# Allegro board testBoard_v8_7x2.brd
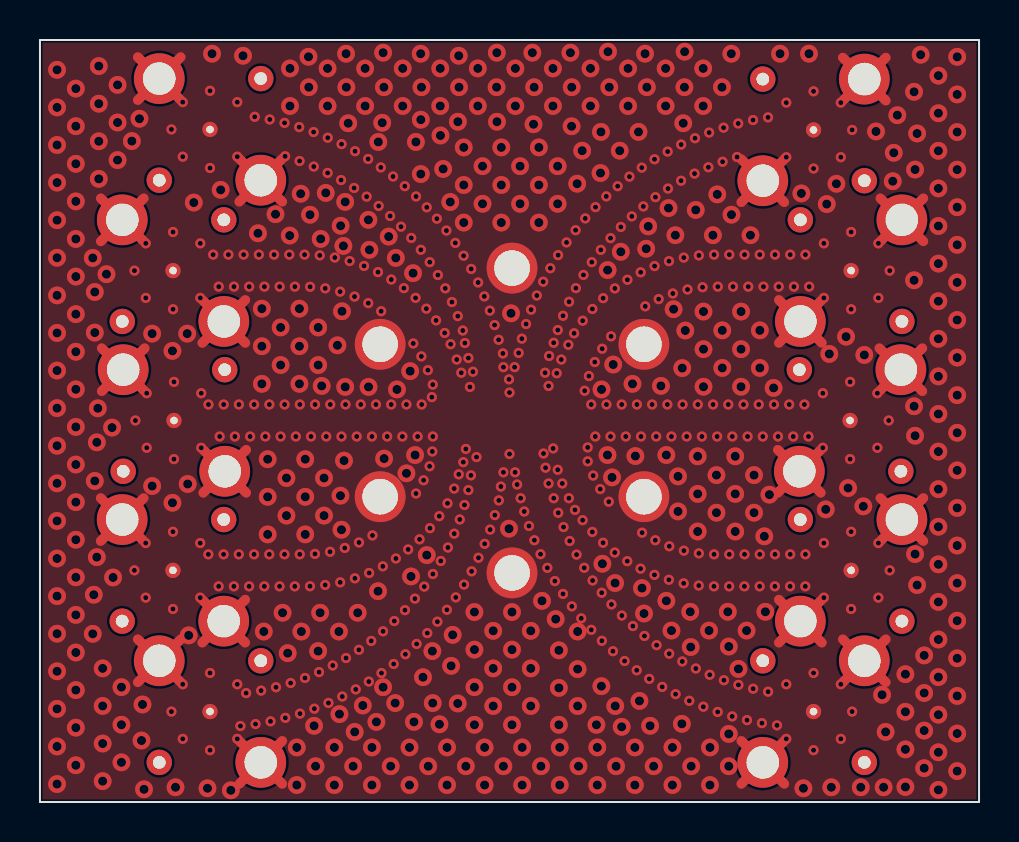
[diagram p0: board, top side]
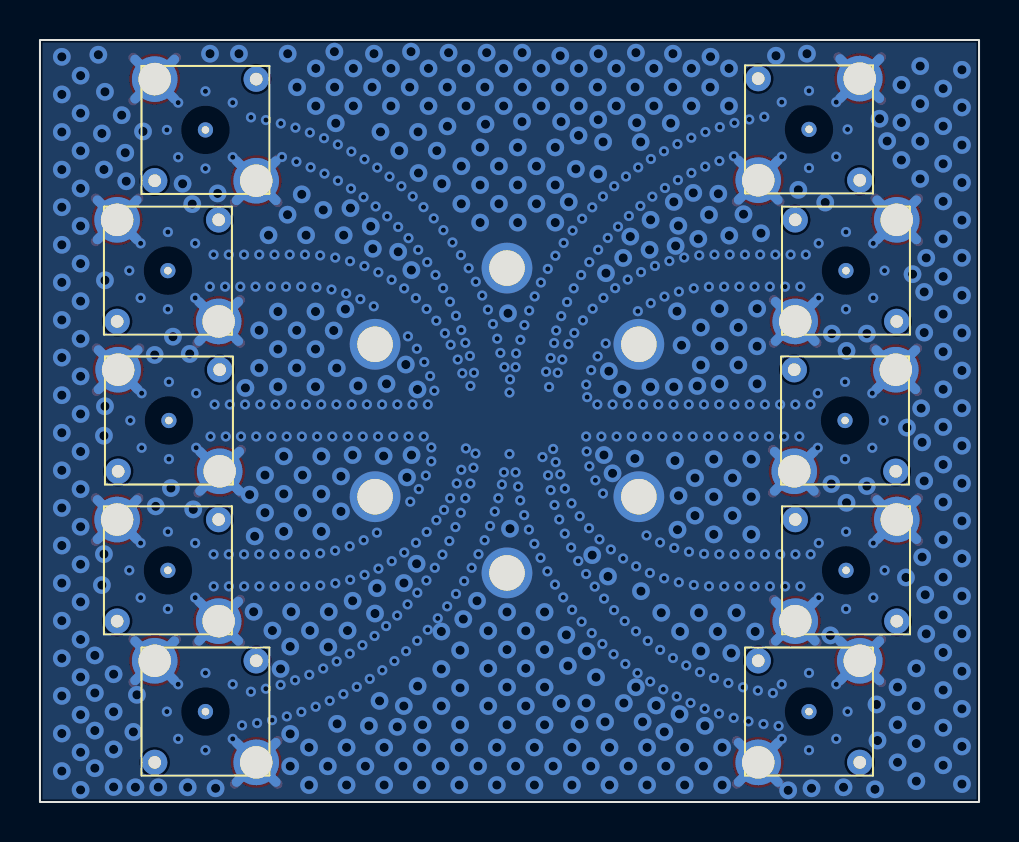
[diagram p1: board, bottom side, seen from below]

Outline 46.99 x 38.1 mm; copper layers: TOP, 02_GND, 03_SIG, BOTTOM. Coordinates in mm from the lower left corner of the outline.
Outline path: rectangle 0,0 46.99,38.1

## Placement (name value [footprint] x y rotation side)
J1  -  [SSMA_BB]  6.71 19.08 90 bottom
J2  -  [SSMA_BB]  40.54 19.08 180 bottom
J3  -  [SSMA_BB]  6.65 11.58 90 bottom
J4  -  [SSMA_BB]  40.59 11.58 180 bottom
J5  -  [SSMA_BB]  6.66 26.57 90 bottom
J6  -  [SSMA_BB]  40.59 26.57 180 bottom
J7  -  [SSMA_BB]  8.51 4.52 90 bottom
J8  -  [SSMA_BB]  38.71 4.52 180 bottom
J9  -  [SSMA_BB]  8.51 33.63 90 bottom
J10  -  [SSMA_BB]  38.71 33.6 180 bottom
MTG1  -  [HOLE070P]  23.62 26.7 0 top
MTG2  -  [HOLE070P]  30.22 22.89 300 top
MTG3  -  [HOLE070P]  30.22 15.27 240 top
MTG4  -  [HOLE070P]  23.62 11.46 180 top
MTG5  -  [HOLE070P]  17.02 15.27 120 top
MTG6  -  [HOLE070P]  17.02 22.89 60 top
NOREF  -  []  23.5 18.55 90 top
NOREF#2  -  []  22.36 17.81 0 top
NOREF#3  -  []  20.5 19.05 0 top
NOREF#4  -  []  19.99 19.05 0 top
NOREF#5  -  []  0 0 90 top
NOREF#6  -  []  0 38.1 0 top
NOREF#7  -  []  23.5 18.05 90 top

## Library data of the parts
J1-J10 = SSMA_BB
MTG1-MTG6 = HOLE070P

## Footprints (pads in the part's own frame, mm; a bottom-side part is the same pattern mirrored in y, then rotated)
HOLE070P
  round 2.54 hole 1.778: 1(0,0)
SSMA_BB
  round 1.27 hole 0.635: (-2.54,-2.54) (2.54,2.54)
  round 0.762 hole 0.381: 1(0,0)
  round 2.54 hole 1.626: 2(-2.54,2.54) 3(2.54,-2.54)

## Nets
GND: J1.2(TP-2) J1.3(TP-3) J2.2(TP-2) J2.3(TP-3) J3.2(TP-2) J3.3(TP-3) J4.2(TP-2) J4.3(TP-3) J5.2(TP-2) J5.3(TP-3) J6.2(TP-2) J6.3(TP-3) J7.2(TP-2) J7.3(TP-3) J8.2(TP-2) J8.3(TP-3) J9.2(TP-2) J9.3(TP-3) J10.2(TP-2) J10.3(TP-3) MTG1.1(TP-1) MTG2.1(TP-1) MTG3.1(TP-1) MTG4.1(TP-1) MTG5.1(TP-1) MTG6.1(TP-1)
MICROWAVE: J1.1(TP-1) J2.1(TP-1) J3.1(TP-1) J4.1(TP-1) J5.1(TP-1) J6.1(TP-1) J7.1(TP-1) J8.1(TP-1) J9.1(TP-1) J10.1(TP-1)

## Via types
v1: diameter 0.889, hole 0.457, TOP to BOTTOM, 448 vias
v2: diameter 0.508, hole 0.254, TOP to BOTTOM, 484 vias

## Routing (per net, layer and track width the routed paths; a pad name or vN(x,y) marks a point on that pad's centre or on a via; arc(x,y) is an arc through that point)
GND: length 344.5
  TOP w0.483: J7.2 12.12,3.06 ; J7.2 9.97,3.06 ; J7.2 9.97,0.91 ; J7.2 12.12,0.91 ; J2.3 39.07,17.61 ; J2.3 39.07,15.46 ; J2.3 36.92,15.46 ; J2.3 36.92,17.61 ; J7.3 7.04,8.14 ; J7.3 7.04,5.99 ; J7.3 4.89,5.99 ; J7.3 4.89,8.14 ; J6.2 44.2,30.18 ; J6.2 42.05,30.18 ; J6.2 42.05,28.03 ; J6.2 44.2,28.03 ; 8.12,7.97 J3.2 ; J3.2 10.27,10.12 ; J3.2 10.27,7.97 ; J3.2 8.12,10.12 ; J2.2 44.15,22.69 ; J2.2 42,22.69 ; J2.2 42,20.54 ; J2.2 44.15,20.54 ; J8.3 37.24,0.91 ; J8.3 37.24,3.06 ; J8.3 35.09,0.91 ; J8.3 35.09,3.06 ; J1.3 5.24,20.54 ; J1.3 5.24,22.69 ; J1.3 3.09,22.69 ; J1.3 3.09,20.54 ; J8.2 42.32,5.99 ; J8.2 42.32,8.14 ; J8.2 40.17,5.99 ; J8.2 40.17,8.14 ; 3.04,15.2 J3.3 ; J3.3 3.04,13.05 ; J3.3 5.19,13.05 ; J3.3 5.19,15.2 ; J10.3 37.24,29.99 ; J10.3 35.09,32.14 ; J10.3 35.09,29.99 ; J10.3 37.24,32.14 ; 9.97,30.01 J9.2 ; J9.2 9.97,32.16 ; J9.2 12.12,30.01 ; J9.2 12.12,32.16 ; J5.3 5.19,30.18 ; J5.3 5.19,28.03 ; J5.3 3.04,30.18 ; J5.3 3.04,28.03 ; 36.97,22.95 J6.3 ; J6.3 39.12,22.95 ; J6.3 36.97,25.1 ; J6.3 39.12,25.1 ; J4.3 39.12,7.97 ; J4.3 36.97,7.97 ; J4.3 39.12,10.12 ; J4.3 36.97,10.12 ; J9.3 7.04,37.24 ; J9.3 4.89,35.09 ; J9.3 4.89,37.24 ; J9.3 7.04,35.09 ; 8.12,22.95 J5.2 ; J5.2 10.27,25.1 ; J5.2 10.27,22.95 ; J5.2 8.12,25.1 ; J4.2 44.2,13.05 ; J4.2 42.05,15.2 ; J4.2 44.2,15.2 ; J4.2 42.05,13.05 ; J1.2 10.32,17.61 ; J1.2 8.17,15.46 ; J1.2 8.17,17.61 ; J1.2 10.32,15.46 ; 40.17,35.07 J10.2 ; J10.2 40.17,37.22 ; J10.2 42.32,35.07 ; J10.2 42.32,37.22
  03_SIG w0.483: J7.2 12.03,2.97 ; J7.2 10.06,2.97 ; J7.2 12.03,1 ; J7.2 10.06,1 ; 42.14,13.14 J4.2 ; J4.2 42.14,15.11 ; J4.2 44.11,15.11 ; J4.2 44.11,13.14 ; 37.01,17.52 J2.3 ; J2.3 37.01,15.55 ; J2.3 38.98,15.55 ; J2.3 38.98,17.52 ; J9.2 12.03,30.1 ; J9.2 10.06,30.1 ; J9.2 12.03,32.07 ; J9.2 10.06,32.07 ; J8.2 42.23,8.05 ; J8.2 40.26,6.08 ; J8.2 42.23,6.08 ; J8.2 40.26,8.05 ; J10.3 37.15,32.05 ; J10.3 37.15,30.08 ; J10.3 35.18,32.05 ; J10.3 35.18,30.08 ; 37.06,8.06 J4.3 ; J4.3 39.03,8.06 ; J4.3 37.06,10.03 ; J4.3 39.03,10.03 ; J10.2 42.23,35.16 ; J10.2 40.26,37.13 ; J10.2 42.23,37.13 ; J10.2 40.26,35.16 ; 42.14,28.12 J6.2 ; J6.2 44.11,30.09 ; J6.2 44.11,28.12 ; J6.2 42.14,30.09 ; 3.13,28.12 J5.3 ; J5.3 5.1,28.12 ; J5.3 5.1,30.09 ; J5.3 3.13,30.09 ; 8.26,17.52 J1.2 ; J1.2 10.23,15.55 ; J1.2 10.23,17.52 ; J1.2 8.26,15.55 ; J3.2 10.18,10.03 ; J3.2 10.18,8.06 ; J3.2 8.21,10.03 ; J3.2 8.21,8.06 ; J8.3 37.15,1 ; J8.3 35.18,2.97 ; J8.3 35.18,1 ; J8.3 37.15,2.97 ; 4.98,6.08 J7.3 ; J7.3 6.95,6.08 ; J7.3 6.95,8.05 ; J7.3 4.98,8.05 ; 3.18,22.6 J1.3 ; J1.3 3.18,20.63 ; J1.3 5.15,22.6 ; J1.3 5.15,20.63 ; J6.3 39.03,23.04 ; J6.3 37.06,25.01 ; J6.3 39.03,25.01 ; J6.3 37.06,23.04 ; 8.21,25.01 J5.2 ; J5.2 10.18,23.04 ; J5.2 8.21,23.04 ; J5.2 10.18,25.01 ; J2.2 44.06,20.63 ; J2.2 42.09,20.63 ; J2.2 42.09,22.6 ; J2.2 44.06,22.6 ; J3.3 5.1,13.14 ; J3.3 3.13,15.11 ; J3.3 3.13,13.14 ; J3.3 5.1,15.11 ; J9.3 6.95,37.15 ; J9.3 6.95,35.18 ; J9.3 4.98,35.18 ; J9.3 4.98,37.15
  BOTTOM w0.483: J6.2 44.11,30.09 ; J6.2 42.14,30.09 ; J6.2 42.14,28.12 ; J6.2 44.11,28.12 ; 42.14,13.14 J4.2 ; J4.2 42.14,15.11 ; J4.2 44.11,15.11 ; J4.2 44.11,13.14 ; J1.3 5.15,22.6 ; J1.3 5.15,20.63 ; J1.3 3.18,22.6 ; J1.3 3.18,20.63 ; 40.26,37.13 J10.2 ; J10.2 42.23,37.13 ; J10.2 42.23,35.16 ; J10.2 40.26,35.16 ; J9.2 12.03,30.1 ; J9.2 10.06,32.07 ; J9.2 12.03,32.07 ; J9.2 10.06,30.1 ; J3.2 10.18,10.03 ; J3.2 8.21,10.03 ; J3.2 10.18,8.06 ; J3.2 8.21,8.06 ; 4.98,6.08 J7.3 ; J7.3 4.98,8.05 ; J7.3 6.95,8.05 ; J7.3 6.95,6.08 ; J4.3 39.03,8.06 ; J4.3 37.06,10.03 ; J4.3 39.03,10.03 ; J4.3 37.06,8.06 ; J5.2 10.18,23.04 ; J5.2 10.18,25.01 ; J5.2 8.21,25.01 ; J5.2 8.21,23.04 ; J3.3 5.1,13.14 ; J3.3 5.1,15.11 ; J3.3 3.13,13.14 ; J3.3 3.13,15.11 ; J8.3 37.15,2.97 ; J8.3 35.18,2.97 ; J8.3 37.15,1 ; J8.3 35.18,1 ; 42.09,22.6 J2.2 ; J2.2 44.06,20.63 ; J2.2 42.09,20.63 ; J2.2 44.06,22.6 ; 37.01,17.52 J2.3 ; J2.3 38.98,17.52 ; J2.3 38.98,15.55 ; J2.3 37.01,15.55 ; 40.26,8.05 J8.2 ; J8.2 40.26,6.08 ; J8.2 42.23,8.05 ; J8.2 42.23,6.08 ; 10.06,1 J7.2 ; J7.2 12.03,2.97 ; J7.2 10.06,2.97 ; J7.2 12.03,1 ; 37.06,25.01 J6.3 ; J6.3 39.03,23.04 ; J6.3 37.06,23.04 ; J6.3 39.03,25.01 ; J9.3 6.95,35.18 ; J9.3 4.98,37.15 ; J9.3 4.98,35.18 ; J9.3 6.95,37.15 ; J1.2 10.23,17.52 ; J1.2 8.26,15.55 ; J1.2 10.23,15.55 ; J1.2 8.26,17.52 ; 35.18,30.08 J10.3 ; J10.3 37.15,32.05 ; J10.3 35.18,32.05 ; J10.3 37.15,30.08 ; 3.13,30.09 J5.3 ; J5.3 5.1,28.12 ; J5.3 3.13,28.12 ; J5.3 5.1,30.09
  vias: v1(0.85,36.61) v1(0.85,34.73) v1(0.85,32.85) v1(0.85,30.97) v1(0.85,29.09) v1(0.85,27.21) v1(0.85,25.33) v1(0.85,23.45) v1(0.85,21.57) v1(0.85,19.69) v1(0.85,17.81) v1(0.85,15.93) v1(0.85,14.05) v1(0.85,12.17) v1(0.85,10.29) v1(0.85,8.42) v1(0.85,6.54) v1(0.85,4.66) v1(0.85,2.78) v1(0.85,0.9) v1(1.79,35.67) v1(1.79,33.79) v1(1.79,31.91) v1(1.79,30.03) v1(1.79,28.15) v1(1.79,26.27) v1(1.79,24.39) v1(1.79,22.51) v1(1.79,20.63) v1(1.79,18.75) v1(1.79,16.87) v1(1.79,14.99) v1(1.79,13.11) v1(1.79,11.23) v1(1.79,9.36) v1(1.79,7.48) v1(1.79,5.6) v1(1.79,3.72) v1(1.79,1.84) v1(2.64,27.2) v1(2.64,8.41) v1(2.74,25.5) v1(2.74,23.47) v1(2.74,16.05) v1(2.69,10.36) v1(2.84,17.98) v1(2.84,12.24) v1(2.94,36.8) v1(2.94,34.92) v1(2.94,33.04) v1(2.94,31.16) v1(2.9,19.69) v1(3.14,6.68) v1(3.14,4.8) v1(3.14,2.92) v1(3.14,1.04) v1(3.33,26.39) v1(3.61,18.72) v1(3.66,11.23) v1(3.88,35.86) v1(3.88,33.98) v1(3.88,32.1) v1(4.08,5.74) v1(4.08,3.86) v1(4.08,1.98) v1(4.6,33.05) v1(4.98,34.16) v1(5.13,4.88) v1(5.08,3.07) v1(5.21,0.64) v1(5.61,23.42) v1(5.61,15.8) v1(6.63,22.56) v1(6.63,14.96) v1(6.78,0.74) v1(7.37,23.42) v1(7.39,15.9) v1(7.44,8.33) v1(7.7,29.97) v1(8.38,0.69) v1(8.61,37.41) v1(9.04,30.61) v1(9.55,0.58) v1(10.16,37.31) v1(10.91,28.44) v1(11.1,24.67) v1(11.1,22.79) v1(11.1,20.91) v1(11.2,8.52) v1(11.39,17.14) v1(11.39,15.26) v1(11.39,13.38) v1(11.79,29.39) v1(12.04,23.73) v1(12.04,21.85) v1(12.14,9.46) v1(12.33,16.2) v1(12.33,14.32) v1(12.4,7.44) v1(12.51,36.68) v1(12.51,34.8) v1(12.5,28.32) v1(12.85,2.73) v1(12.85,0.85) v1(12.98,24.67) v1(12.98,22.79) v1(12.98,20.91) v1(13.05,30.41) v1(13.08,8.52) v1(13.27,17.14) v1(13.27,15.26) v1(13.27,13.38) v1(13.44,37.26) v1(13.45,35.74) v1(13.51,29.36) v1(13.72,3.81) v1(13.79,1.79) v1(13.92,23.73) v1(13.92,21.85) v1(13.92,7.54) v1(14.02,9.46) v1(14.05,28.15) v1(14.1,20.8) v1(14.21,16.2) v1(14.21,14.32) v1(14.3,30.45) v1(14.39,36.68) v1(14.39,34.8) v1(14.73,2.73) v1(14.73,0.85) v1(14.88,22.83) v1(15.04,15.32) v1(14.96,8.52) v1(14.99,4.39) v1(15.05,28.81) v1(15.11,24.54) v1(15.09,13.61) v1(15.18,27.81) v1(15.21,17.07) v1(15.32,37.41) v1(15.33,35.74) v1(15.27,30.01) v1(15.27,20.75) v1(15.43,33.94) v1(15.67,1.79) v1(15.75,3.51) v1(15.9,9.46) v1(16.15,4.83) v1(16.27,36.68) v1(16.27,34.8) v1(16.43,29.11) v1(16.44,20.75) v1(16.48,27.61) v1(16.61,2.73) v1(16.61,0.85) v1(16.83,4.01) v1(16.93,33) v1(16.92,10.54) v1(17.13,33.96) v1(17.17,37.47) v1(17.21,35.74) v1(17.22,17.17) v1(17.17,5.74) v1(17.45,28.27) v1(17.55,1.79) v1(17.81,27.2) v1(17.77,4.95) v1(17.86,20.63) v1(18.15,36.68) v1(18.15,34.8) v1(18.34,16.43) v1(18.52,21.54) v1(18.49,2.73) v1(18.49,0.85) v1(18.57,11.28) v1(18.67,26.44) v1(18.71,4.01) v1(18.81,33) v1(18.77,17.35) v1(19.05,37.41) v1(19.09,35.74) v1(19.06,34.12) v1(19.06,31.4) v1(19.17,6.24) v1(19.35,12.34) v1(19.43,1.79) v1(19.63,7.54) v1(19.65,4.95) v1(20.03,36.68) v1(20.03,34.8) v1(20.04,33.32) v1(19.99,3.89) v1(20.17,31.65) v1(20.37,2.73) v1(20.37,0.85) v1(20.53,30) v1(20.57,6.81) v1(20.65,8.36) v1(20.91,34.01) v1(20.9,4.93) v1(20.96,37.31) v1(20.97,35.74) v1(21.21,32.73) v1(21.21,30.85) v1(21.21,28.97) v1(21.31,1.79) v1(21.74,9.5) v1(21.74,7.62) v1(21.74,5.74) v1(21.74,3.86) v1(21.91,36.68) v1(21.91,34.8) v1(22.15,31.79) v1(22.15,29.91) v1(22.25,2.73) v1(22.25,0.85) v1(22.68,8.56) v1(22.68,6.68) v1(22.68,4.8) v1(22.86,37.47) v1(22.85,35.74) v1(22.87,34.01) v1(23.09,32.73) v1(23.09,30.85) v1(23.09,28.97) v1(23.19,1.79) v1(23.47,13.67) v1(23.57,24.43) v1(23.62,9.5) v1(23.62,7.62) v1(23.62,5.74) v1(23.62,3.86) v1(23.79,36.68) v1(23.79,34.8) v1(24.02,31.79) v1(24.02,29.91) v1(24.13,2.73) v1(24.13,0.85) v1(24.64,37.47) v1(24.56,8.56) v1(24.56,6.68) v1(24.56,4.8) v1(24.73,35.74) v1(24.7,33.89) v1(24.96,32.73) v1(24.96,30.85) v1(24.96,28.97) v1(25.12,10.06) v1(25.07,1.79) v1(25.67,36.68) v1(25.67,34.8) v1(25.81,9.14) v1(25.9,31.79) v1(25.9,29.91) v1(25.97,7.58) v1(25.97,5.71) v1(25.97,3.86) v1(26.01,2.73) v1(26.01,0.85) v1(26.54,37.47) v1(26.61,35.74) v1(26.6,33.79) v1(26.88,30.91) v1(26.91,8.52) v1(26.91,6.65) v1(26.91,4.8) v1(26.95,1.79) v1(27.13,32.57) v1(27.55,36.68) v1(27.55,34.8) v1(27.85,3.86) v1(27.89,2.73) v1(27.89,0.85) v1(28.07,33.5) v1(28.05,31.45) v1(28.1,20.63) v1(28.14,11.91) v1(28.09,5.79) v1(28.42,37.52) v1(28.4,26.6) v1(28.4,17.35) v1(28.49,35.74) v1(28.63,16.23) v1(28.68,21.87) v1(28.78,10.95) v1(28.78,4.8) v1(28.83,1.79) v1(29.01,32.57) v1(29.06,27.51) v1(29.11,3.76) v1(29.43,36.68) v1(29.43,34.8) v1(29.65,20.91) v1(29.79,17.3) v1(29.77,2.73) v1(29.77,0.85) v1(29.95,33.5) v1(30,5.05) v1(30.12,10.69) v1(30.23,9.42) v1(30.28,37.41) v1(30.33,27.66) v1(30.37,35.74) v1(30.44,28.78) v1(30.53,3.81) v1(30.71,1.79) v1(31.07,20.81) v1(31.31,36.68) v1(31.31,34.8) v1(31.34,17.35) v1(31.34,10.06) v1(31.45,29.7) v1(31.6,8.57) v1(31.71,24.64) v1(31.65,2.73) v1(31.65,0.85) v1(31.79,28.34) v1(31.93,16.28) v1(31.93,14.53) v1(32.14,21.69) v1(32.12,3.91) v1(32.19,33.94) v1(32.26,37.52) v1(32.25,35.74) v1(32.29,23.57) v1(32.54,9.51) v1(32.56,7.75) v1(32.59,1.79) v1(32.81,29.6) v1(32.91,17.28) v1(32.91,15.4) v1(32.91,13.53) v1(33.19,36.68) v1(33.19,34.8) v1(33.2,24.52) v1(33.2,22.64) v1(33.2,20.76) v1(33.48,8.57) v1(33.53,2.73) v1(33.53,0.85) v1(33.67,28.34) v1(33.89,30.38) v1(33.85,16.34) v1(33.85,14.47) v1(34.13,35.74) v1(34.14,23.58) v1(34.14,21.7) v1(34.42,9.51) v1(34.47,7.77) v1(34.47,3.4) v1(34.47,1.79) v1(34.59,37.41) v1(34.6,29.37) v1(34.79,17.28) v1(34.79,15.4) v1(34.79,13.53) v1(34.95,6.65) v1(35.08,24.52) v1(35.08,22.64) v1(35.08,20.76) v1(35.36,8.57) v1(35.55,28.34) v1(35.73,16.34) v1(35.73,14.47) v1(36.02,23.58) v1(36.02,21.7) v1(36.25,13.28) v1(36.3,9.51) v1(36.5,15.37) v1(36.71,20.7) v1(37.03,37.41) v1(38.1,30.43) v1(38.2,0.69) v1(38.48,37.41) v1(39.32,14.63) v1(39.37,29.9) v1(39.5,22.4) v1(39.6,0.74) v1(39.85,30.91) v1(40.34,23.27) v1(40.44,15.7) v1(41.07,0.74) v1(41.2,14.78) v1(41.25,22.35) v1(41.83,33.53) v1(42.14,5.36) v1(42.21,0.74) v1(42.32,3.51) v1(42.72,32.46) v1(42.67,31.04) v1(42.9,34.34) v1(43.31,6.39) v1(43.31,4.51) v1(43.31,2.63) v1(43.31,0.75) v1(43.74,35.51) v1(43.74,26.09) v1(43.74,19.79) v1(43.79,31.62) v1(43.79,18.31) v1(43.79,12.4) v1(43.89,33.43) v1(43.89,10.85) v1(44.07,37.36) v1(44.25,7.33) v1(44.25,5.45) v1(44.25,3.57) v1(44.25,1.69) v1(44.96,36.32) v1(44.96,34.44) v1(44.96,32.56) v1(44.96,30.68) v1(44.96,28.8) v1(44.96,26.92) v1(44.96,25.04) v1(44.96,23.16) v1(44.96,21.28) v1(44.96,19.4) v1(44.96,17.52) v1(44.96,15.64) v1(44.96,13.76) v1(44.96,11.88) v1(44.96,10) v1(44.96,8.12) v1(44.96,6.24) v1(44.96,4.36) v1(44.96,2.49) v1(44.96,0.61) v1(45.9,37.26) v1(45.9,35.38) v1(45.9,33.5) v1(45.9,31.62) v1(45.9,29.74) v1(45.9,27.86) v1(45.9,25.98) v1(45.9,24.1) v1(45.9,22.22) v1(45.9,20.34) v1(45.9,18.46) v1(45.9,16.58) v1(45.9,14.7) v1(45.9,12.82) v1(45.9,10.94) v1(45.9,9.06) v1(45.9,7.18) v1(45.9,5.3) v1(45.9,3.42) v1(45.9,1.55) v2(4.73,26.57) v2(4.72,11.58) v2(4.78,19.08) v2(5.3,27.93) v2(5.3,25.2) v2(5.34,20.44) v2(5.34,17.71) v2(5.29,12.95) v2(5.29,10.22) v2(6.58,33.63) v2(6.58,4.52) v2(6.66,28.5) v2(6.66,24.64) v2(6.71,21.01) v2(6.71,17.14) v2(6.65,13.51) v2(6.65,9.65) v2(7.15,34.99) v2(7.15,32.27) v2(7.15,5.89) v2(7.15,3.16) v2(8.02,27.93) v2(8.02,25.2) v2(8.02,12.95) v2(8.02,10.22) v2(8.07,20.44) v2(8.07,17.71) v2(8.43,19.88) v2(8.43,12.38) v2(8.51,35.56) v2(8.51,31.7) v2(8.51,6.45) v2(8.51,2.59) v2(8.67,27.37) v2(8.94,10.78) v2(8.95,25.77) v2(8.99,18.28) v2(9.19,19.88) v2(9.19,12.38) v2(9.43,27.37) v2(9.71,25.77) v2(9.7,10.78) v2(9.75,18.28) v2(9.87,34.99) v2(9.87,32.27) v2(9.87,5.89) v2(9.87,3.16) v2(9.95,19.88) v2(9.95,12.38) v2(10.03,3.8) v2(10.19,27.37) v2(10.32,5.44) v2(10.47,25.77) v2(10.52,18.28) v2(10.46,10.78) v2(10.72,19.88) v2(10.71,12.38) v2(10.75,34.26) v2(10.79,3.9) v2(10.95,27.37) v2(11.07,5.57) v2(11.23,25.77) v2(11.23,10.78) v2(11.28,18.28) v2(11.5,34.13) v2(11.48,19.88) v2(11.47,12.38) v2(11.54,4.03) v2(11.71,27.37) v2(11.81,5.74) v2(11.99,25.77) v2(12.04,18.28) v2(11.99,10.78) v2(12.24,33.95) v2(12.24,19.88) v2(12.24,12.38) v2(12.27,32.29) v2(12.28,4.21) v2(12.48,27.37) v2(12.54,5.95) v2(12.76,25.77) v2(12.8,18.28) v2(12.75,10.78) v2(12.97,33.74) v2(12.99,32.05) v2(13,19.88) v2(13,12.38) v2(13.01,4.42) v2(13.24,27.37) v2(13.26,6.2) v2(13.52,25.76) v2(13.51,10.79) v2(13.56,18.28) v2(13.69,33.5) v2(13.7,31.77) v2(13.73,4.67) v2(13.76,19.88) v2(13.76,12.41) v2(14,27.33) v2(13.97,6.49) v2(14.28,25.68) v2(14.33,18.28) v2(14.27,10.85) v2(14.4,33.21) v2(14.39,31.45) v2(14.44,4.95) v2(14.53,19.88) v2(14.51,12.51) v2(14.65,6.83) v2(14.75,27.22) v2(15.02,25.52) v2(15.02,10.98) v2(15.09,32.89) v2(15.07,31.1) v2(15.09,18.28) v2(15.13,5.27) v2(15.29,19.88) v2(15.25,12.7) v2(15.32,7.2) v2(15.5,27.05) v2(15.72,30.7) v2(15.74,25.27) v2(15.77,32.54) v2(15.76,11.18) v2(15.8,5.63) v2(15.85,18.28) v2(15.96,12.98) v2(15.96,7.61) v2(16.05,19.88) v2(16.22,26.8) v2(16.42,32.15) v2(16.35,30.27) v2(16.43,24.94) v2(16.47,11.45) v2(16.45,6.02) v2(16.61,18.28) v2(16.64,13.33) v2(16.58,8.05) v2(16.81,19.88) v2(16.91,26.49) v2(16.95,29.8) v2(17.06,31.73) v2(17.07,24.54) v2(17.09,6.45) v2(17.16,11.78) v2(17.17,8.53) v2(17.37,18.28) v2(17.52,29.3) v2(17.58,26.12) v2(17.57,19.88) v2(17.67,31.28) v2(17.73,9.05) v2(17.7,6.9) v2(17.81,12.18) v2(18.07,28.77) v2(18.14,18.28) v2(18.21,25.69) v2(18.26,30.79) v2(18.34,19.88) v2(18.26,9.59) v2(18.29,7.39) v2(18.42,12.63) v2(18.58,28.2) v2(18.68,22.93) v2(18.82,30.28) v2(18.79,25.2) v2(18.82,15.42) v2(18.76,10.17) v2(18.9,18.28) v2(18.85,7.9) v2(18.99,13.13) v2(19.06,27.61) v2(19.08,22.28) v2(19.1,19.88) v2(19.2,16.09) v2(19.23,10.77) v2(19.33,24.67) v2(19.35,29.73) v2(19.41,21.59) v2(19.38,8.45) v2(19.5,26.99) v2(19.5,16.79) v2(19.51,13.69) v2(19.61,20.24) v2(19.63,17.53) v2(19.66,20.87) v2(19.66,18.28) v2(19.66,11.4) v2(19.82,24.08) v2(19.86,29.17) v2(19.91,26.35) v2(19.89,9.02) v2(19.98,14.29) v2(20.06,12.05) v2(20.34,28.57) v2(20.28,25.68) v2(20.25,23.45) v2(20.39,14.93) v2(20.41,12.72) v2(20.36,9.61) v2(20.61,25) v2(20.55,22.89) v2(20.73,15.67) v2(20.73,13.42) v2(20.78,27.95) v2(20.81,10.23) v2(20.91,24.29) v2(20.85,22.12) v2(20.96,16.38) v2(21.01,14.13) v2(21.08,21.46) v2(21.2,27.31) v2(21.16,23.57) v2(21.18,16.99) v2(21.24,14.85) v2(21.22,10.87) v2(21.26,22.95) v2(21.31,17.65) v2(21.44,22.2) v2(21.44,15.6) v2(21.51,20.75) v2(21.58,26.65) v2(21.56,16.33) v2(21.6,11.53) v2(21.67,21.51) v2(21.84,17.25) v2(21.93,25.98) v2(21.94,12.21) v2(22.24,25.28) v2(22.25,12.91) v2(22.51,24.57) v2(22.52,13.62) v2(22.75,23.85) v2(22.76,14.34) v2(22.95,23.11) v2(22.96,15.08) v2(23.06,15.77) v2(23.16,22.43) v2(23.19,21.74) v2(23.19,16.48) v2(23.47,21.13) v2(23.5,20.47) v2(23.5,17.4) v2(23.75,21.74) v2(23.77,16.48) v2(23.88,15.88) v2(23.95,22.45) v2(24.11,23.17) v2(24.05,15.19) v2(24.23,14.52) v2(24.32,23.9) v2(24.47,13.8) v2(24.57,24.62) v2(24.74,13.09) v2(24.86,25.32) v2(25.05,12.39) v2(25.18,26.01) v2(25.2,17.42) v2(25.27,21.46) v2(25.3,16.71) v2(25.39,11.71) v2(25.54,26.69) v2(25.48,22.3) v2(25.45,20.8) v2(25.45,15.93) v2(25.7,22.96) v2(25.68,17.68) v2(25.71,15.19) v2(25.76,11.05) v2(25.93,27.34) v2(25.91,23.6) v2(25.86,21.44) v2(25.91,16.61) v2(25.93,14.46) v2(26.09,22.12) v2(26.14,15.93) v2(26.17,24.31) v2(26.2,13.75) v2(26.17,10.4) v2(26.35,27.98) v2(26.44,22.86) v2(26.48,25.01) v2(26.47,15.19) v2(26.51,13.05) v2(26.61,9.78) v2(26.73,23.44) v2(26.8,28.59) v2(26.82,25.69) v2(26.77,14.61) v2(26.85,12.37) v2(27.09,9.18) v2(27.2,26.35) v2(27.16,24.06) v2(27.15,14.09) v2(27.23,11.71) v2(27.29,29.18) v2(27.26,20.56) v2(27.41,17.73) v2(27.41,17.03) v2(27.47,21.3) v2(27.61,26.99) v2(27.64,24.65) v2(27.58,19.88) v2(27.64,13.5) v2(27.59,8.61) v2(27.68,16.32) v2(27.65,11.08) v2(27.8,29.74) v2(27.76,22) v2(27.79,18.28) v2(28.03,15.65) v2(28.06,27.61) v2(28.13,22.66) v2(28.11,10.46) v2(28.12,8.06) v2(28.18,25.19) v2(28.18,12.96) v2(28.34,30.28) v2(28.35,19.88) v2(28.46,15.01) v2(28.55,28.19) v2(28.58,23.28) v2(28.55,18.28) v2(28.6,9.88) v2(28.67,7.54) v2(28.77,25.68) v2(28.76,12.47) v2(28.91,30.79) v2(29.07,28.75) v2(29.11,19.88) v2(29.12,9.32) v2(29.31,18.28) v2(29.25,7.05) v2(29.39,26.11) v2(29.39,12.04) v2(29.5,31.27) v2(29.62,29.28) v2(29.67,8.8) v2(29.87,19.88) v2(29.86,6.59) v2(30.11,31.72) v2(30.06,26.49) v2(30.07,18.28) v2(30.13,13.47) v2(30.05,11.67) v2(30.19,29.78) v2(30.29,24.78) v2(30.25,8.3) v2(30.49,6.16) v2(30.63,19.88) v2(30.75,32.14) v2(30.8,30.24) v2(30.75,26.8) v2(30.84,18.28) v2(30.79,13.09) v2(30.75,11.36) v2(30.85,7.84) v2(30.96,25.14) v2(31.14,5.76) v2(31.41,32.52) v2(31.43,30.67) v2(31.39,19.88) v2(31.48,27.04) v2(31.49,12.79) v2(31.47,11.11) v2(31.49,7.42) v2(31.6,18.28) v2(31.67,25.43) v2(31.81,5.39) v2(32.08,32.87) v2(32.08,31.06) v2(32.14,7.03) v2(32.22,27.22) v2(32.16,19.88) v2(32.22,12.57) v2(32.21,10.93) v2(32.4,25.62) v2(32.36,18.28) v2(32.49,5.06) v2(32.78,33.19) v2(32.75,31.42) v2(32.82,6.67) v2(32.92,19.88) v2(32.97,27.33) v2(32.97,12.43) v2(32.96,10.82) v2(33.12,18.28) v2(33.16,25.74) v2(33.19,4.76) v2(33.49,33.47) v2(33.45,31.74) v2(33.51,6.36) v2(33.73,27.37) v2(33.68,19.88) v2(33.73,12.38) v2(33.73,10.78) v2(33.92,25.77) v2(33.88,18.28) v2(33.91,4.5) v2(34.21,33.72) v2(34.16,32.01) v2(34.22,6.09) v2(34.44,19.88) v2(34.49,27.37) v2(34.49,12.38) v2(34.49,10.78) v2(34.64,4.28) v2(34.68,25.77) v2(34.65,18.28) v2(34.94,33.93) v2(34.88,32.25) v2(34.95,5.86) v2(35.2,19.88) v2(35.26,27.37) v2(35.26,12.38) v2(35.25,10.78) v2(35.44,25.77) v2(35.41,18.28) v2(35.38,4.09) v2(35.68,34.1) v2(35.69,5.66) v2(36.02,27.37) v2(35.97,19.88) v2(36.02,12.38) v2(36.01,10.78) v2(36.13,3.94) v2(36.2,25.77) v2(36.17,18.28) v2(36.43,34.23) v2(36.43,5.51) v2(36.73,19.88) v2(36.78,27.37) v2(36.78,12.38) v2(36.77,10.78) v2(36.93,18.28) v2(36.88,3.83) v2(36.97,25.77) v2(37.35,34.97) v2(37.35,32.24) v2(37.35,5.89) v2(37.35,3.16) v2(37.54,27.37) v2(37.49,19.88) v2(37.54,12.38) v2(37.54,10.78) v2(37.73,25.77) v2(37.69,18.28) v2(38.3,27.37) v2(38.25,19.88) v2(38.3,12.38) v2(38.3,10.78) v2(38.49,25.77) v2(38.46,18.28) v2(38.71,35.53) v2(38.71,31.67) v2(38.71,6.45) v2(38.71,2.59) v2(39.23,27.93) v2(39.23,25.2) v2(39.17,20.44) v2(39.17,17.71) v2(39.23,12.95) v2(39.23,10.22) v2(40.07,34.97) v2(40.07,32.24) v2(40.07,5.89) v2(40.07,3.16) v2(40.54,21.01) v2(40.54,17.14) v2(40.64,33.6) v2(40.59,28.5) v2(40.59,24.64) v2(40.59,13.51) v2(40.59,9.65) v2(40.64,4.52) v2(41.9,20.44) v2(41.9,17.71) v2(41.95,27.93) v2(41.95,25.2) v2(41.95,12.95) v2(41.95,10.22) v2(42.52,26.57) v2(42.47,19.08) v2(42.52,11.58)
MICROWAVE: length 198.2
  03_SIG w0.33: 24.41,19.08 24.41,18.82 arc(28.6,8.71) J8.1 ; 24.41,19.08 24.41,19.3 arc(28.6,29.42) J10.1 ; 24.41,19.08 22.58,19.08 ; 24.41,19.08 26.29,19.08 ; 20.7,19.08 22.58,19.08 ; 20.7,19.08 J1.1 ; 20.7,19.08 arc(18.51,13.78) 13.21,11.58 J3.1 ; 20.7,19.08 arc(18.51,24.37) 13.21,26.57 J5.1 ; 22.58,19.08 22.58,18.59 arc(18.46,8.64) J7.1 ; 22.58,19.08 22.58,19.56 arc(18.46,29.51) J9.1 ; 26.29,19.08 J2.1 ; 26.29,19.08 arc(28.48,24.37) 33.78,26.57 J6.1 ; 26.29,19.08 arc(28.48,13.78) 33.78,11.58 J4.1

## Copper pours and planes (outline as drawn; the poured copper is in the pictures)
GND on TOP, BOTTOM, 02_GND, 03_SIG: 0.13,0.13 46.86,0.13 46.86,37.97 0.13,37.97

## Text on the board
Ref Des/Silkscreen Top: NEEL IS AWESOME
XSECTION_CHART: *  SURFACE - 0 MIL | L1: TOP CONDUCTOR - 1.8 MIL | *  DIELECTRIC - 16 MIL | L2: 02_GND PLANE - 2.4 MIL | *  DIELECTRIC - 21.9 MIL | L3: 03_SIG CONDUCTOR - 0.8 MIL | *  DIELECTRIC - 12 MIL | L4: BOTTOM CONDUCTOR - 2.4 MIL | 1-4 | 3-4
DIMENSION: NOTES: UNLESS OTHERWISE SPECIFIED | - CLASS 2 | - MATERIAL: FR408 RECOMMENDED | - COPPER WEGITH: SEE XSECTION | - BOARD FINISH THICKNESS; 0.057 INCHES +/- <.010 OR 10% | - SOLDERMASK: NOT REQUIRED | - ALL INSIDE CORNERS AND SLOTS SHALL HAVE .062 INCHES | +/- 0.005" OR LESS RADIUS | - LEGEND/SILKSCREEN: NOT REQUIRED | - DRILLING: ALL HOLES TO BE LOCATED BY X & Y COORDINATES | FROM NC DRILL DATA SUPPLIED. SEE DRILL TABLE FOR HOLE | SIZES AND QUANTITY DRILLED HOLE TRUE POSITION DIFFERENCE | FROM CAD DATA IS NOT TO EXCESS 0.005" | - MINIMUM ANULAR RING OF 1 MIL. UNLESS OTHERWISE SPECIFIED | - COPPER PLATING HOLE WALL TO BE .001" MINIMUM | - FINISH COPPER SURFACE NOT TO BE PLATED | - CONDUCTOR: WIDTHS AND SPACING: TRACE WIDTH CAN BE | MODIFIED TO ACHEIVE 50 OHM CHARACTERISITC IMPEDANCE | - ON THE 8 CAVITIES (R), PLEASE CREATE A 7 MIL X 7 MIL | ABOVE THEM IN THE SAME ORIENTATION THROUGH LAYERS 1 AND | 2 TO EXPOSE LAYER 3 (SAME DIMENSIONS AS CENTER CAVITY) | - CENTER CUTOUT SQUARE CENTERED @ 0,0. CUTOUT 1-3 SHOULD | EXPOSE LAYER 03_SIG COPPER TRACE | 0,0 DRL | FIGURE | SIZE | 10.0 | 18.0 | 25.0 | 64.0 | 70.0 | DRILL CHART: TOP to BOTTOM | ALL UNITS ARE IN MILS | TOLERANCE | +3.0/-3.0 | PLATED | QTY | 484 | 448 | 20 | 6
NCLEGEND-3-4: FIGURE | SIZE | 15.0 | DRILL CHART: 03_SIG to BOTTOM | ALL UNITS ARE IN MILS | TOLERANCE | +3.0/-3.0 | PLATED | QTY | 10
